# Altium PCB SigmatorDriver.PcbDoc
Units mm, origin at the board's own origin, x right, y up, seen from the top; angles counter-clockwise.
Board outline 275 x 100 mm, 2 copper layers (Top Layer, Bottom Layer), stack 1.58 mm thick; 111 components, 65 nets, 307 pads, 9 vias.
Unrouted connection lines stored in the file: 144.
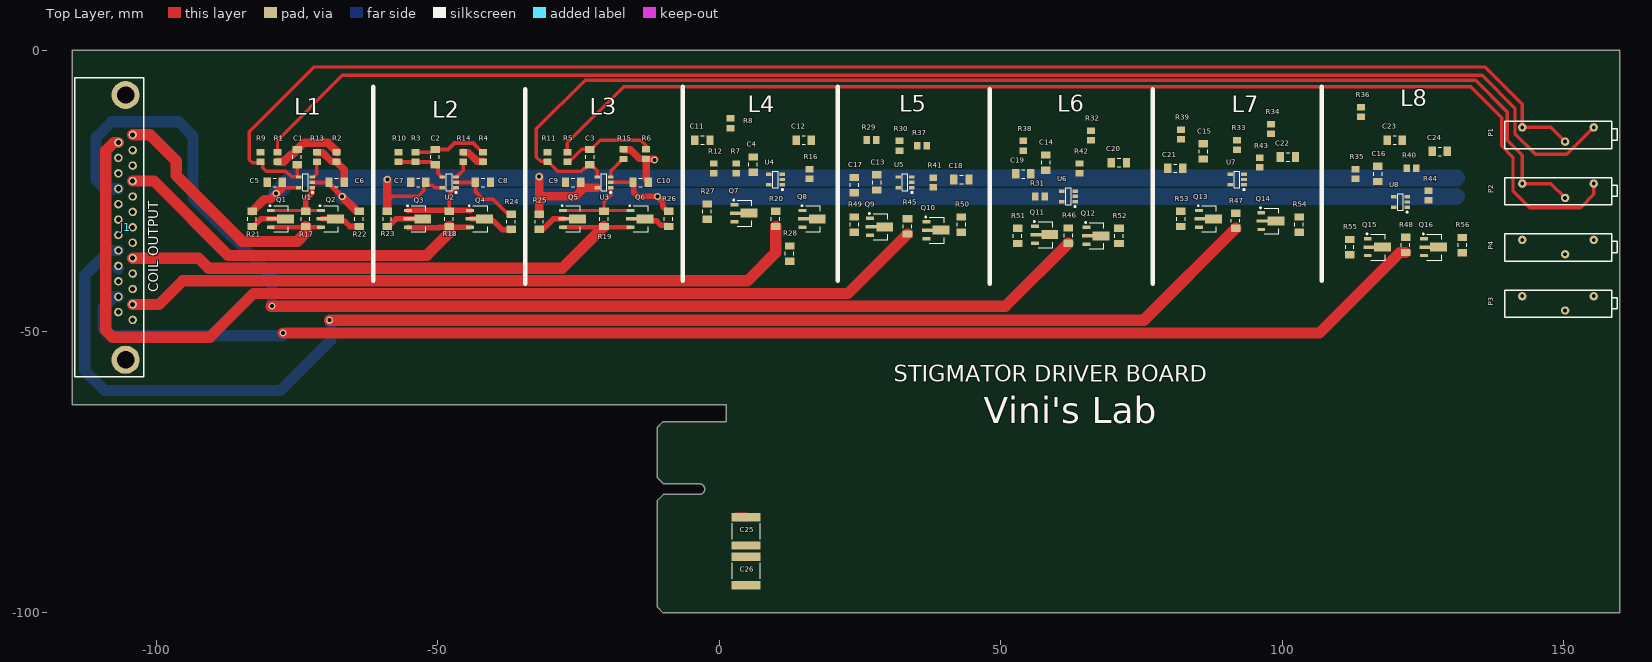
[diagram p0: Top Layer view]
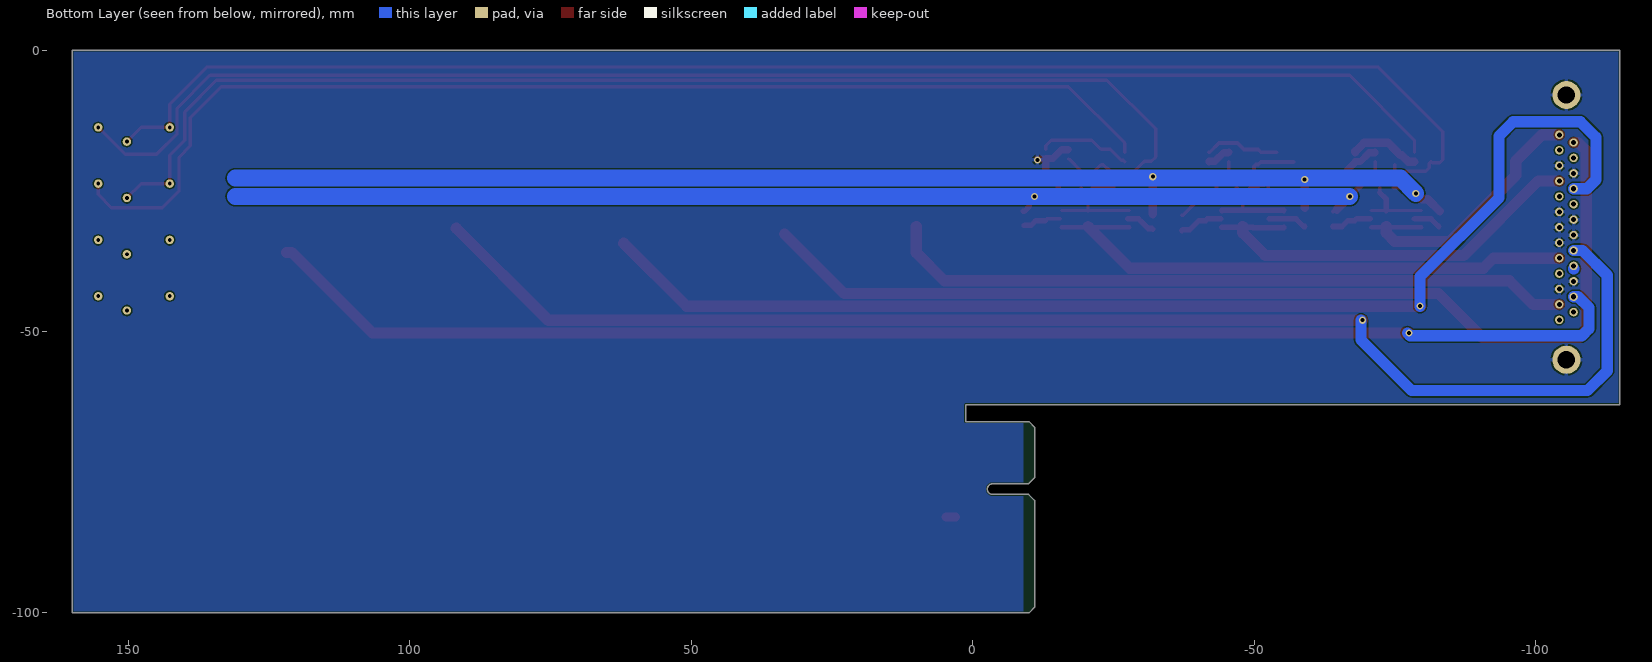
[diagram p1: Bottom Layer view, seen from below]

## Layer stack, top to bottom
Top Solder: solder mask 0.01, Solder Resist, Dk 3.5
Top Layer: signal copper 0.04
Dielectric 1: dielectric 1.5, FR-4, Dk 4.8
Bottom Layer: signal copper 0.04
Bottom Solder: solder mask 0.01, Solder Resist, Dk 3.5

## Board outline
-11,-99 -10,-100 160,-100 160,0 -115,0 -115,-63 1.25,-63 1.25,-66 -10,-66 -11,-67 -11,-76 -9.95,-77.05 -3.55,-77.05 cw(c-3.55,-78) -3.55,-78.95 -9.95,-78.95 -11,-80

## Design rules (kind name [scope] priority, off if disabled: settings)
BoardOutlineClearance [All] p1: gap=0.3 ignorepadtopadclearanceinfootprint=FALSE
Clearance [All] p1: gap=0.25 ignorepadtopadclearanceinfootprint=FALSE
HoleToHoleClearance [All] p1: gap=0.3 allowstackedmicrovias=TRUE
MinimumSolderMaskSliver [All] p1: minsoldermaskwidth=0.2
PolygonConnect [All] p1: connectstyle=Relief reliefconductorwidth=0.7 reliefentries=4 polygonreliefangle="90 Angle" airgapwidth=0.3
RoutingVias [All] p1: holewidth=0.711 width=1.27 viastyle="Through Hole" minholewidth=0.711 minwidth=1.27 maxholewidth=0.711 maxwidth=1.27
SilkToSolderMaskClearance [IsPad] p1: minsilkscreentomaskgap=0.1 clearancetoexposedcopper=TRUE
SolderMaskExpansion [All] p1: expansion=0.102 istentingtop=FALSE
Width [All] p1: maxlimit=5 minlimit=0.25 preferedwidth=0.5
27 further rules are at their usual default settings.

## Components (designator, comment, footprint, x,y, rotation, side; value= is the part's Value field where it differs from the comment)
C1 "1nF" C1206 -75,-19 r90 top
C2 "1nF" C1206 -50.5,-19 r90 top
C3 "1nF" C1206 -23,-19 r90 top
C4 "1nF" C1206 6,-20.35 r90 top
C5 "1uF" C1206 -79,-23.5 r0 top
C6 "1uF" C1206 -68,-23.5 r180 top
C7 "1uF" C1206 -53.5,-23.5 r0 top
C8 "1uF" C1206 -42,-23.5 r180 top
C9 "1uF" C1206 -26,-23.5 r0 top
C10 "1uF" C1206 -14,-23.5 r180 top
C11 "1uF" C1206 -3,-16 r0 top
C12 "1uF" C1206 15,-16 r0 top
C13 "1nF" C1206 28,-23.5 r90 top
C14 "1nF" C1206 58,-20 r90 top
C15 "1nF" C1206 86,-18 r90 top
C16 "1nF" C1206 117,-22 r90 top
C17 "1uF" C1206 24,-24 r270 top
C18 "1uF" C1206 43,-23 r0 top
C19 "1uF" C1206 54,-22 r0 top
C20 "1uF" C1206 71,-20 r0 top
C21 "1uF" C1206 81,-21 r0 top
C22 "1uF" C1206 101,-19 r0 top
C23 "1uF" C1206 120,-16 r0 top
C24 "1uF" C1206 128,-18 r0 top
C25 "10uF" C2220 4.75,-85.5 r90 top
C26 "10uF" C2220 4.75,-92.525 r90 top
J1 "D25S33E4PA00LF" D25S33E4PA00LF -105.5,-31.5 r270 top locked
P1 "89PR10KLFTB" 89PR10KLFTB 149,-15 r0 top
P2 "89PR10KLFTB" 89PR10KLFTB 149,-25 r0 top
P3 "89PR10KLFTB" 89PR10KLFTB 149,-45 r0 top
P4 "89PR10KLFTB" 89PR10KLFTB 149,-35 r0 top
Q1 "BCX55-16,135" SOT-89-3 -77.9,-30 r0 top
Q2 "BCX52-16,115" SOT-89-3 -69,-30 r0 top
Q3 "BCX55-16,135" SOT-89-3 -53.5,-30 r0 top
Q4 "BCX52-16,115" SOT-89-3 -42.5,-30 r0 top
Q5 "BCX55-16,135" SOT-89-3 -26,-30 r0 top
Q6 "BCX52-16,115" SOT-89-3 -14,-30 r0 top
Q7 "BCX55-16,135" SOT-89-3 4.475,-28.975 r0 top
Q8 "BCX52-16,115" SOT-89-3 16.6,-30 r0 top
Q9 "BCX55-16,135" SOT-89-3 28.575,-31.4 r0 top
Q10 "BCX52-16,115" SOT-89-3 38.6,-32 r0 top
Q11 "BCX55-16,135" SOT-89-3 57.9,-32.8 r0 top
Q12 "BCX52-16,115" SOT-89-3 67,-33 r0 top
Q13 "BCX55-16,135" SOT-89-3 87,-30 r0 top
Q14 "BCX52-16,115" SOT-89-3 98.075,-30.375 r0 top
Q15 "BCX55-16,135" SOT-89-3 117,-35 r0 top
Q16 "BCX52-16,115" SOT-89-3 127,-35 r0 top
R1 "5.52K" R0805 -78.5,-19 r270 top
R2 "1K" R0805 -68,-19 r90 top
R3 "9.09K" R0805 -54,-19 r90 top
R4 "1K" R0805 -42,-19 r90 top
R5 "5.52K" R0805 -27,-19 r270 top
R6 "1K" R0805 -13,-18.5 r90 top
R7 "9.09K" R0805 3,-21 r90 top
R8 "1K" R0805 2,-13 r270 top
R9 "20K" R0805 -81.5,-19 r90 top
R10 "20K" R0805 -57,-19 r90 top
R11 "20K" R0805 -30.5,-19 r90 top
R12 "20K" R0805 -1,-21 r270 top
R13 "6.81K" R0805 -71.5,-19 r90 top
R14 "6.81K" R0805 -45.5,-19 r90 top
R15 "6.81K" R0805 -17,-18.5 r90 top
R16 "6.81K" R0805 16,-22 r90 top
R17 "100R" R1206 -73.5,-30 r90 top
R18 "100R" R1206 -48,-30 r90 top
R19 "100R" R1206 -20.5,-30 r90 top
R20 "100R" R1206 10,-30 r90 top
R21 "49.9R" R1206 -83,-30 r90 top
R22 "49.9R" R1206 -64,-30 r270 top
R23 "49.9R" R1206 -59,-30 r90 top
R24 "49.9R" R1206 -37,-30.5 r270 top
R25 "49.9R" R1206 -32,-30.5 r90 top
R26 "49.9R" R1206 -9,-30 r270 top
R27 "49.9R" R1206 -2.175,-28.7 r90 top
R28 "49.9R" R1206 12.5,-36.15 r270 top
R29 "5.52K" R0805 27,-16 r180 top
R30 "1K" R0805 32,-17 r270 top
R31 "9.09K" R0805 57,-26 r0 top
R32 "1K" R0805 66,-15.15 r90 top
R33 "5.52K" R0805 92,-16.85 r90 top
R34 "1K" R0805 98,-14 r90 top
R35 "9.09K" R0805 113,-22 r90 top
R36 "1K" R0805 114,-11 r270 top
R37 "20K" R0805 36,-17 r0 top
R38 "20K" R0805 54,-17 r90 top
R39 "20K" R0805 82,-15 r90 top
R40 "20K" R0805 123,-21 r0 top
R41 "6.81K" R0805 38,-23.5 r90 top
R42 "6.81K" R0805 64,-21 r90 top
R43 "6.81K" R0805 96,-20 r90 top
R44 "6.81K" R0805 126,-25.85 r90 top
R45 "100R" R1206 33.425,-31.325 r90 top
R46 "100R" R1206 62,-32.975 r90 top
R47 "100R" R1206 91.725,-30.325 r90 top
R48 "100R" R1206 121.925,-34.6 r90 top
R49 "49.9R" R1206 24,-31 r90 top
R50 "49.9R" R1206 43,-31 r270 top
R51 "49.9R" R1206 53,-33 r90 top
R52 "49.9R" R1206 71,-33 r270 top
R53 "49.9R" R1206 82,-30 r90 top
R54 "49.9R" R1206 103,-31 r270 top
R55 "49.9R" R1206 112,-35 r90 top
R56 "49.9R" R1206 132,-34.65 r270 top
U1 "TLV9361IDBVR" SOT-23-5 -73.5,-23.5 r180 top
U2 "TLV9361IDBVR" SOT-23-5 -48,-23.5 r180 top
U3 "TLV9361IDBVR" SOT-23-5 -20.5,-23.5 r180 top
U4 "TLV9361IDBVR" SOT-23-5 10,-23 r180 top
U5 "TLV9361IDBVR" SOT-23-5 33,-23.5 r180 top
U6 "TLV9361IDBVR" SOT-23-5 62,-26 r180 top
U7 "TLV9361IDBVR" SOT-23-5 92,-23 r180 top
U8 "TLV9361IDBVR" SOT-23-5 121,-27 r180 top

## Footprints (in the part's own frame and the unit in brackets; to place one, negate y for a bottom-side part, rotate by r counter-clockwise, add the part's x,y. Pads: shape width x height; smd on the part's side, far side on the other; paste and mask are expansions set on the pad)
89PR10KLFTB [mm]
  round 1.5 hole 0.7: 1(-6.35,1.27) 2(1.27,-1.27) 3(6.35,1.27)
  silkscreen extent -9.47,-2.5 10.5,2.33, body extent -9.47,-2.37 9.53,2.38, height 6.35
C1206 [mm] "Chip Capacitor, 2-Leads, Body 3.10x1.50mm, IPC Medium Density"
  rect 1.3x1.7 smd: 1(-1.35,0) 2(1.35,0)
  silkscreen extent -0.3,-0.75 0.3,0.75, body extent -1.65,-0.85 1.65,0.85, height 0.65
C2220 [mm] "Chip Capacitor, 2-Leads, Body 5,70x5,00mm, IPC Medium Density"
  rect 1.5x5.15 smd: 1(-2.525,0) 2(2.525,0)
  silkscreen extent -1.4,-2.47 1.4,2.48, body extent -2.85,-2.5 2.85,2.5, height 2.5
D25S33E4PA00LF [mm]
  round 1.5 hole 0.9: 1(-16.45,1.27) 2(-13.71,1.27) 3(-10.97,1.27) 4(-8.23,1.27) 5(-5.49,1.27) 6(-2.75,1.27) 7(-0.01,1.27) 8(2.73,1.27) 9(5.47,1.27) 10(8.21,1.27) 11(10.95,1.27) 12(13.69,1.27) 13(16.43,1.27) 14(-15.08,-1.27) 15(-12.34,-1.27) 16(-9.6,-1.27) 17(-6.86,-1.27) 18(-4.12,-1.27) 19(-1.38,-1.27) 20(1.36,-1.27) 21(4.1,-1.27) 22(6.84,-1.27) 23(9.58,-1.27) 24(12.32,-1.27) 25(15.06,-1.27)
  round 5 hole 3.1: S(-23.52,0) S(23.52,0)
  silkscreen extent -26.61,-9 26.5,3.25, body extent -26.51,-15.5 26.51,3.2, height 12.55
R0805 [mm] "Chip Resistor, 2-Leads, Body 2.00x1.25mm, IPC Medium Density"
  rect 1.15x1.4 smd: 1(-0.85,0) 2(0.85,0)
  body extent -1.07,-0.7 1.07,0.7, height 0.65
R1206 [mm] "Chip Resistor, 2-Leads, Body 3.10x1.50mm, IPC Medium Density"
  rect 1.3x1.7 smd: 1(-1.35,0) 2(1.35,0)
  silkscreen extent -0.3,-0.75 0.3,0.75, body extent -1.65,-0.85 1.65,0.85, height 0.65
SOT-23-5 [mm] "SOT23, 5-Leads, Body 2.90x2.45mm, Pitch 0.95mm, IPC Medium Density"
  rect 1x0.6 smd: 1(-1.2,0.95) 2(-1.2,0) 3(-1.2,-0.95) 4(1.2,-0.95) 5(1.2,0.95)
  silkscreen extent -1.33,-1.5 0.5,1.92, body extent -1.3,-1.5 1.3,1.5, height 1.1
SOT-89-3 [mm] "SOT89, 3-Leads, Body 4.50x2.50mm, Pitch 1.50mm, Lead Span 4.1mm, IPC Medium Density"
  rect 1.4x0.6 smd: 1(-1.8,1.5) 3(-1.8,-1.5)
  rect 2x0.6 smd: 2(-1.6,0)
  rect 3x1.6 smd: 2(0.8,0)
  silkscreen extent -2.05,-2.3 1.32,2.47, body extent -2.2,-2.3 1.85,2.3, height 1.6

## Part data
C1 C2 C3 C4 C5 C6 C7 C8 C9 C10 C11 C12 C13 C14 C15 C16 C17 C18 C19 C20 C21 C22 C23 C24: library part C1206, "Capacitor 1206", Voltage=V
  C1 C2 C3 C4 C13 C14 C15 C16: Capacitance=1nF
  C5 C6 C7 C8 C9 C10 C11 C12 C17 C18 C19 C20 C21 C22 C23 C24: Capacitance=1uF
C25 C26: library part C2220, "Capacitor 2220", Voltage=50V, Capacitance=10uF
J1: library part DB-25, Supplier Part Number 1=609-5879-ND, Supplier 1=Digi-Key
P1 P2 P3 P4: Supplier Part Number 1=987-1801-5-ND, Supplier 1=Digi-Key, Supplier 2=Mouser, Supplier Part Number 2=858-89PR10KLFTB
Q1 Q3 Q5 Q7 Q9 Q11 Q13 Q15: "NPN 1A 60V 1.25W 180MHz", Supplier Part Number 1=1727-1964-1-ND, Supplier 1=Digi-Key
Q2 Q4 Q6 Q8 Q10 Q12 Q14 Q16: "PNP 1A 60V 1.3W 145MHz", Supplier Part Number 1=1727-6209-1-ND, Supplier 1=Digi-Key
R1 R2 R3 R4 R5 R6 R7 R8 R9 R10 R11 R12 R13 R14 R15 R16 R29 R30 R31 R32 R33 R34 R35 R36 R37 R38 R39 R40 R41 R42 R43 R44: library part R0.25W, "Resistor 1/2W", Power=1/4W
  R1 R5 R29 R33: Resistance=5.52K
  R2 R4 R6 R8 R30 R32 R34 R36: Resistance=1K
  R3 R7 R31 R35: Resistance=9.09K
  R9 R10 R11 R12 R37 R38 R39 R40: Resistance=20K
  R13 R14 R15 R16 R41 R42 R43 R44: Resistance=6.81K
R17 R18 R19 R20 R21 R22 R23 R24 R25 R26 R27 R28 R45 R46 R47 R48 R49 R50 R51 R52 R53 R54 R55 R56: library part R0.5W, "Resistor 1/2W", Power=1/2W
  R17 R18 R19 R20 R45 R46 R47 R48: Resistance=100R
  R21 R22 R23 R24 R25 R26 R27 R28 R49 R50 R51 R52 R53 R54 R55 R56: Resistance=49.9R

## Via types
v1: diameter 1.27, hole 0.711, Top Layer to Bottom Layer, 9 vias

## Nets (pads, with @x,y where several pads share a name; then routed paths per layer and width w, separated by ;. In a path a pad name is that pad's centre, name@x,y a point inside that pad or via, vN(x,y) a via of type N, cw(c..) or ccw(c..) an arc to the next point about the centre after c; other vN are vias at no path point)
+12: C5.2 C7.2 C9.2 C11.2 C17.2 C19.2 C21.2 C23.2 C25.2 R21.2 R23.2 R25.2 R27.2 R49.2 R51.2 R53.2 R55.2 U1.5 U2.5 U3.5 U4.5 U5.5 U6.5 U7.5 U8.5 | length 259.2
  Top Layer w0.6: -77.704,-24.45 U1.5 ; -59,-27 -58,-26 -53.5,-26 -52.5,-25 -52.5,-23.85 C7.2 -52.15,-23.65 -51.8,-24 -51,-24 -50.55,-24.45 U2.5
  Top Layer w1.5: R21.2 -80.85,-26.5 -79.754,-26.5 v1(-78.729,-25.475) -77.704,-24.45 ; -59,-28 -59,-27 v1(-59,-23) ; R25.2 -32,-26 ; v1(-32,-22.5) -32,-26 ; C9.2 -24.65,-25.121 ; U3.5 -23.979,-24.45 -24.65,-25.121 ; -32,-26 -25.529,-26 -24.65,-25.121
  Top Layer w1.6: C25.2@3.025,-82.975 C25.2
  Bottom Layer w3: v1(-78.729,-25.475) -76.004,-22.75 131,-22.75
-12: C6.2 C8.2 C10.2 C12.2 C18.2 C20.2 C22.2 C24.2 C26.1 R22.1 R24.1 R26.1 R28.1 R50.1 R52.1 R54.1 R56.1 U1.2 U2.2 U3.2 U4.2 U5.2 U6.2 U7.2 U8.2 | length 235.5
  Top Layer w0.6: U3.2 C10.2
  Top Layer w0.7: U1.2 C6.2 C6.2@-69.35,-23.7 ; R22.1@-64.7,-28.35 -64.3,-28.35 R22.1 ; U2.2 C8.2 -43.35,-25.15 -42,-26.5 -40.225,-26.5 -37.375,-29.35 R24.1@-37.175,-29.35
  Top Layer w1: C6.2@-69.35,-23.7 v1@-67.025,-26.025 ; C10.2 -15.2,-23.65 -15.2,-25.3 -14.5,-26 v1(-11,-26) -10.057,-26.943 -10.057,-27.793 -9.2,-28.65 R26.1
  Top Layer w1.5: v1@-67.025,-26.025 R22.1@-64.7,-28.35
  Bottom Layer w3: v1(-67,-26) 131,-26
GND: C5.1 C6.1 C7.1 C8.1 C9.1 C10.1 C11.1 C12.1 C17.1 C18.1 C19.1 C20.1 C21.1 C22.1 C23.1 C24.1 C25.1 C26.2 J1.3 J1.6 J1.7 J1.8 J1.11 J1.16 J1.19 J1.20 J1.23 J1.S R2.1 R4.1 R6.1 R8.1 R13.2 R14.2 R15.2 R16.2 R30.1 R32.1 R34.1 R36.1 R41.2 R42.2 R43.2 R44.2 | length 23.1
  Top Layer w1.3: R13.2 -71.5,-18.175 -71.45,-18.225 -70.473,-18.225 -68.898,-19.8 -68.05,-19.8 R2.1 ; R2.1@-67.95,-19.925 -66.65,-21.225 C6.1 ; R14.2 -45.5,-18.175 -45.45,-18.225 -44.577,-18.225 -43.027,-19.775 -42.05,-19.775 -42,-19.825 R4.1 ; R15.2 -17,-17.675 -16.95,-17.725 -15.775,-17.725 -14.225,-19.275 -13.05,-19.275 -13,-19.325 R6.1 ; C10.1 -12.65,-23.3 -13,-22.95 R6.1 ; v1@-11.5,-19.35 R6.1
  other v1: -11.5,-19.5
L1A: J1.1 Q1.3 Q2.3 R17.1 | length 50.7
  Top Layer w0.8: Q1.3 -73.5,-31.5 Q2.3
  Top Layer w2: J1.1 -101.15,-15.05 -96.5,-19.7 -96.5,-22.25 -84.75,-34 -75,-34 -73.5,-32.5 -73.5,-31.5 R17.1
L1B: C1.2 J1.2 R1.2 R2.2 | length 12.7
  Top Layer w1.5: R1.2 -77.414,-19.85 -76.264,-18.7 -76.05,-18.7 C1.2 -73.85,-16.5 -69.5,-16.5 -68,-18 R2.2
L2A: J1.4 Q3.3 Q4.3 R18.1 | length 75.6
  Top Layer w1: Q3.3 -55.25,-31.55 -49.825,-31.55 -49.775,-31.5 -48,-31.5 Q4.3
  Top Layer w2: J1.4 -100.48,-23.27 -87.25,-36.5 -52,-36.5 -48,-32.5 -48,-31.5 R18.1
L2B: C2.2 J1.5 R3.2 R4.2 | length 13.4
  Top Layer w0.7: R3.2 -51.2,-18.15 -50.7,-17.65 C2.2 -48.225,-17.65 -47.075,-16.5 -43.775,-16.5 -42.125,-18.15 R4.2
L3A: J1.9 Q5.3 Q6.3 R19.1 | length 99.5
  Top Layer w0.8: Q5.3 -20.65,-31.5 Q6.3
  Top Layer w2: J1.9 -92.53,-36.97 -90.75,-38.75 -27.9,-38.75 -20.65,-31.5 R19.1
L3B: C3.2 J1.10 R5.2 R6.2 | length 16.7
  Top Layer w0.6: R5.2 -26.725,-19.575 -26.372,-19.575 -24.447,-17.65 -22.8,-17.65 -21.15,-16 -14,-16 -13,-17 R6.2
L4A: J1.12 Q7.3 Q8.3 R20.1 | length 122.7
  Top Layer w2: J1.12 -99.565,-45.19 -95.375,-41 -82.182,-41 5,-41 10,-36 R20.1
L4B: C4.2 J1.13 R7.2 R8.2
L5A: J1.14 Q9.3 Q10.3 R45.1 | length 185.3
  Top Layer w2: J1.14 -107.57,-16.42 -109,-17.85 -109,-49.828 -107.828,-51 -90.5,-51 -82.75,-43.25 22.85,-43.25 R45.1
L5B: C13.2 J1.15 R29.2 R30.2
L6A: J1.17 Q11.3 Q12.3 R46.1 | length 214
  Top Layer w2: v1@-79.679,-45.5 50.825,-45.5 R46.1
  Bottom Layer w2: J1.17 -109.14,-24.64 -110.75,-23.03 -110.75,-15.5 -108,-12.75 -96,-12.75 -93.5,-15.25 -93.5,-26.25 -79.5,-40.25 v1(-79.5,-45.5)
L6B: C14.2 J1.18 R31.2 R32.2
L7A: J1.21 Q13.3 Q14.3 R47.1 | length 245
  Top Layer w2: v1(-69.25,-48) 75.4,-48 R47.1
  Bottom Layer w2: J1.21 -108.35,-35.6 -112.75,-40 -112.75,-57 -109.25,-60.5 -78,-60.5 -69,-51.5 v1@-69,-48
L7B: C15.2 J1.22 R33.2 R34.2 | length 0.1
  Bottom Layer w2: J1.22@-106.858,-38.84 J1.22@-106.77,-38.84
L8A: J1.24 Q15.3 Q16.3 R48.1 | length 245.6
  Top Layer w2: v1(-77.5,-50.25) 106.618,-50.25 120.918,-35.95 R48.1
  Bottom Layer w2: J1.24 -107.57,-43.82 -109.5,-45.75 -109.5,-49.5 -108.25,-50.75 -77.75,-50.75 v1@-77.25,-50.25
L8B: C16.2 J1.25 R35.2 R36.2
NetC1_1: C1.1 P1.1 P1.2 R9.1 U1.4 | length 263.9
  Top Layer w0.6: C1.1 -75,-22.5 -76,-22.5 -77,-21.5 -80.5,-21.5 -81.1,-20.9 -81.1,-20.125 -81.375,-19.85 R9.1 -81.65,-20 -83,-20 -83.5,-19.5 -83.5,-14.5 -72,-3 136,-3 142.65,-9.65 P1.1 147.73,-13.73 P1.2
NetC2_1: C2.1 R3.1 R10.1 U2.4 | length 9.6
  Top Layer w0.7: R10.1 R3.1 -51.2,-19.85 -50.7,-20.35 C2.1 -50.3,-20.35 -50,-20.65 -50,-21.85 -49.3,-22.55 U2.4
NetC3_1: C3.1 P2.1 P2.2 R11.1 U3.4 | length 219.8
  Top Layer w0.6: U3.4 -21.7,-21.45 -22.8,-20.35 C3.1 -23.2,-20.35 -23.85,-21 -24,-21 -24.5,-21.5 -28.725,-21.5 -30.375,-19.85 R11.1 -30.599,-19.751 -31.749,-19.751 -32.5,-19 -32.5,-14 -23.85,-5.35 134.35,-5.35 140,-11 140,-16 142.65,-18.65 P2.1 147.73,-23.73 P2.2
NetC4_1: C4.1 R7.1 R12.1 U4.4
NetC13_1: C13.1 P3.1 P3.2 R37.1 U5.4
NetC14_1: C14.1 R31.1 R38.1 U6.4
NetC15_1: C15.1 P4.1 P4.2 R39.1 U7.4
NetC16_1: C16.1 R35.1 R40.1 U8.4
NetP1_3: P1.3 R1.1 | length 251.2
  Top Layer w0.6: R1.1 -78.5,-16 -67,-4.5 135.5,-4.5 141.35,-10.35 141.35,-14.85 145,-18.5 150.58,-18.5 P1.3
NetP2_3: P2.3 R5.1 | length 206.4
  Top Layer w0.6: R5.1 -27,-16.5 -17,-6.5 133.5,-6.5 139,-12 139,-17 141,-19 141,-25 144,-28 153,-28 155.35,-25.65 P2.3
NetP3_3: P3.3 R29.1
NetP4_3: P4.3 R33.1
NetQ1_1: Q1.1 Q2.1 R17.2 U1.1 | length 13.6
  Top Layer w0.6: Q1.1 R17.2@-73.5,-28.5 ; R17.2 R17.2@-73.5,-28.5 ; -72.3,-25.3 U1.1 ; Q2.1 R17.2@-73.5,-28.5
  Top Layer w1: R17.2@-73.5,-28.5 -73.5,-26.5 -72.3,-25.3
NetQ1_2: Q1.2 R21.1 | length 5.1
  Top Layer w0.6: R21.1 R21.1@-82.8,-31.35
  Top Layer w1: R21.1@-82.8,-31.35 -81.45,-30 -79.5,-30 Q1.2@-78.5,-30
NetQ2_2: Q2.2 R22.2 | length 7.2
  Top Layer w1: Q2.2@-70.6,-30 -68.2,-30 -67.9,-30.3 -66.7,-30.3 -65.65,-31.35 R22.2
NetQ3_1: Q3.1 Q4.1 R18.2 U2.1 | length 15.7
  Top Layer w0.6: R18.2@-48,-28.45 -48,-25.65 -47,-24.65 -47,-24.45 U2.1
  Top Layer w1: Q3.1 -55.25,-28.45 -48,-28.45 -44.35,-28.45 Q4.1
NetQ3_2: Q3.2 R23.1 | length 6.9
  Top Layer w1: R23.1 -58.8,-31.35 -57.45,-30 -55.1,-30 Q3.2@-52.7,-30
NetQ4_2: Q4.2 R24.2 | length 7.8
  Top Layer w1: Q4.2@-44.1,-30 -41.7,-30 -41.4,-30.3 -40.2,-30.3 -38.6,-31.9 -37.325,-31.9 R24.2@-37.175,-32.05
NetQ5_1: Q5.1 Q6.1 R19.2 U3.1 | length 16.7
  Top Layer w0.6: Q5.1 R19.2@-20.5,-28.5 ; R19.2 R19.2@-20.5,-28.5 ; U3.1 -19.3,-25.8 -20.5,-27 R19.2@-20.5,-28.5 ; Q6.1 R19.2@-20.5,-28.5
NetQ5_2: Q5.2 R25.1 | length 5.2
  Top Layer w1: R25.1 -31.85,-31.7 -31.2,-31.7 -30,-30.5 -29.5,-30 Q5.2@-27.6,-30
NetQ6_2: Q6.2 R26.2 | length 7.2
  Top Layer w0.6: Q6.2@-15.6,-30 -13.2,-30 Q6.2@-12.864,-30.336 ; R26.2@-9.211,-31.139 R26.2
  Top Layer w1: Q6.2@-12.864,-30.336 -11.164,-30.336 -10.361,-31.139 R26.2@-9.211,-31.139
NetQ7_1: Q7.1 Q8.1 R20.2 U4.1
NetQ7_2: Q7.2 R27.1
NetQ8_2: Q8.2 R28.2
NetQ9_1: Q9.1 Q10.1 R45.2 U5.1
NetQ9_2: Q9.2 R49.1
NetQ10_2: Q10.2 R50.2
NetQ11_1: Q11.1 Q12.1 R46.2 U6.1
NetQ11_2: Q11.2 R51.1
NetQ12_2: Q12.2 R52.2
NetQ13_1: Q13.1 Q14.1 R47.2 U7.1
NetQ13_2: Q13.2 R53.1
NetQ14_2: Q14.2 R54.2
NetQ15_1: Q15.1 Q16.1 R48.2 U8.1
NetQ15_2: Q15.2 R55.1
NetQ16_2: Q16.2 R56.2
NetR9_2: R9.2 R10.2 R11.2 R12.2
NetR13_1: R13.1 U1.3 | length 3.1
  Top Layer w0.6: U1.3 -72.1,-22.55 -71.5,-21.95 R13.1
NetR14_1: R14.1 U2.3 | length 3.3
  Top Layer w0.7: U2.3 -46.7,-22.55 -45.5,-21.35 R14.1
NetR15_1: R15.1 U3.3 | length 4.2
  Top Layer w0.6: U3.3 -19.3,-21.525 -17.125,-19.35 R15.1
NetR16_1: R16.1 U4.3
NetR37_2: R37.2 R38.2 R39.2 R40.2
NetR41_1: R41.1 U5.3
NetR42_1: R42.1 U6.3
NetR43_1: R43.1 U7.3
NetR44_1: R44.1 U8.3

## Polygon pours and split planes (outlines as drawn)
GND on Bottom Layer "NONET_L-01_P-001" (solid, remove dead copper, pour order 0): -115,0 160,0 160,-100 -9,-100 -9,-66 1.5,-66 1.5,-63 -115,-63

## Silkscreen, mask and mechanical layers (free items; w line width, h text height)
Top Overlay:
  lines w0.8: -61.5,-41 -61.5,-6.5 ; -34.5,-41.5 -34.5,-7 ; -6.5,-41 -6.5,-6.5 ; 21,-41 21,-6.5 ; 48,-41.5 48,-7 ; 77,-41.5 77,-7 ; 107,-41 107,-6.5
  text "L8" at 121,-10.946 h5
  text "L5" at 32,-11.946 h5
  text "L6" at 60,-11.946 h5
  text "L4" at 5,-12 h5
  text "L7" at 91,-12 h5
  text "L3" at -23,-12.446 h5
  text "L1" at -75.5,-12.5 h5
  text "L2" at -51,-13 h5
  text "COIL OUTPUT" at -99.032,-43 h3 r90
  text "STIGMATOR DRIVER BOARD" at 31,-59.946 h5
  text "Vini's Lab" at 47,-67.918 h8
Mechanical 1:
  lines w0.1: -10,-100 -11,-99 -11,-80 -9.95,-78.95 -3.55,-78.95 ccw(c-3.55,-78) -3.55,-77.05 -9.95,-77.05 -11,-76 -11,-67 -10,-66 1.25,-66 1.25,-63
  lines w0.254: -10,-100 0,-100 160,-100 160,0 -115,0 -115,-63 1.25,-63
  lines w0.3: -115,-2.5 160,-2.5 ; 0,-97.5 160,-97.5